# Altium PCB PCB1.PcbDoc
Units mil, origin at the board's own origin, x right, y up, seen from the top; angles counter-clockwise.
Board outline 1560 x 1425 mil, 2 copper layers (Top Layer, Bottom Layer); 33 components, 22 nets, 91 pads, 10 vias.
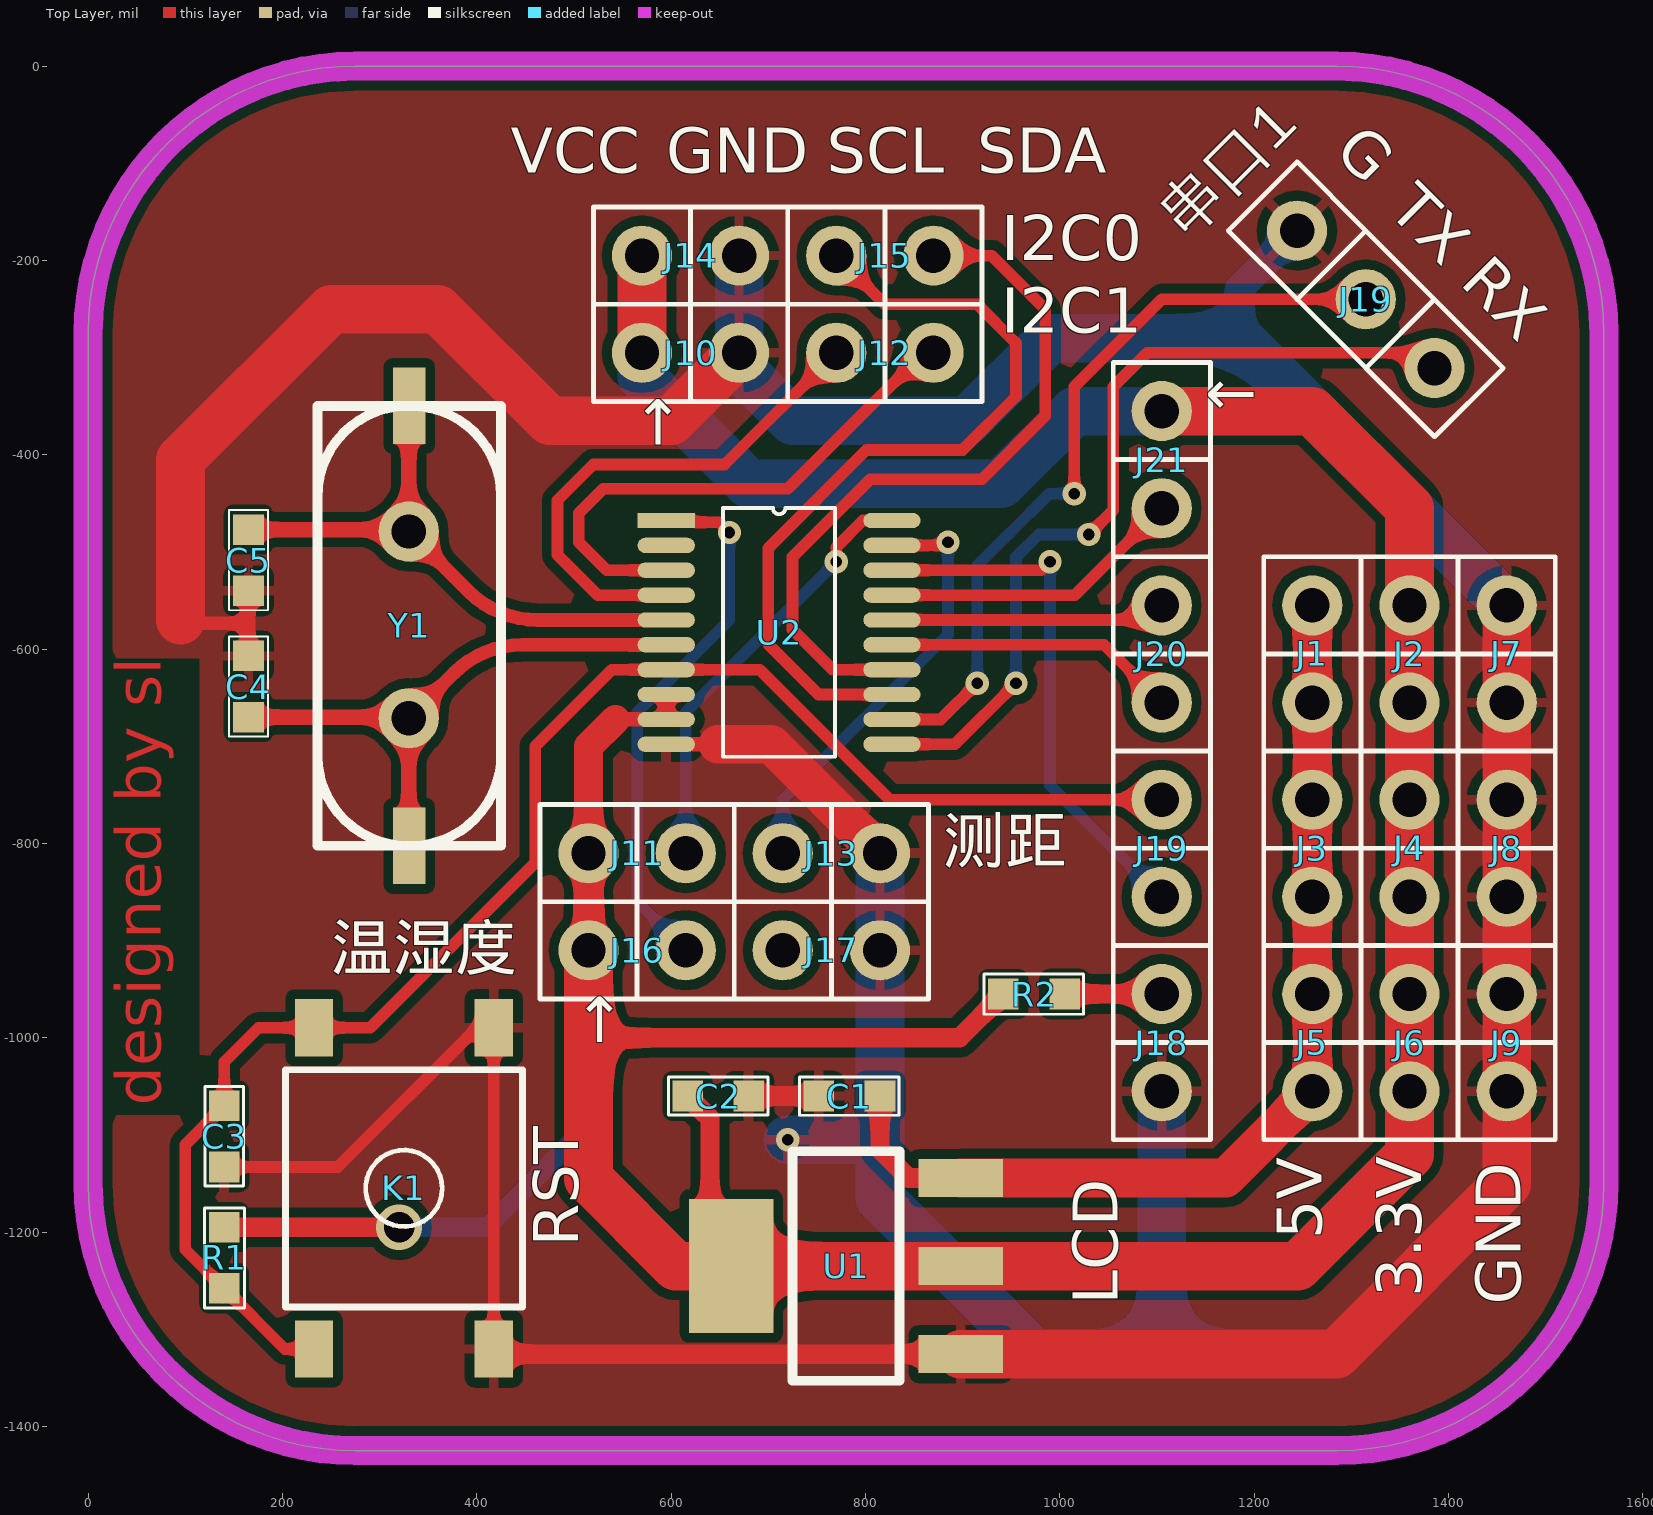
[diagram p0: Top Layer view]
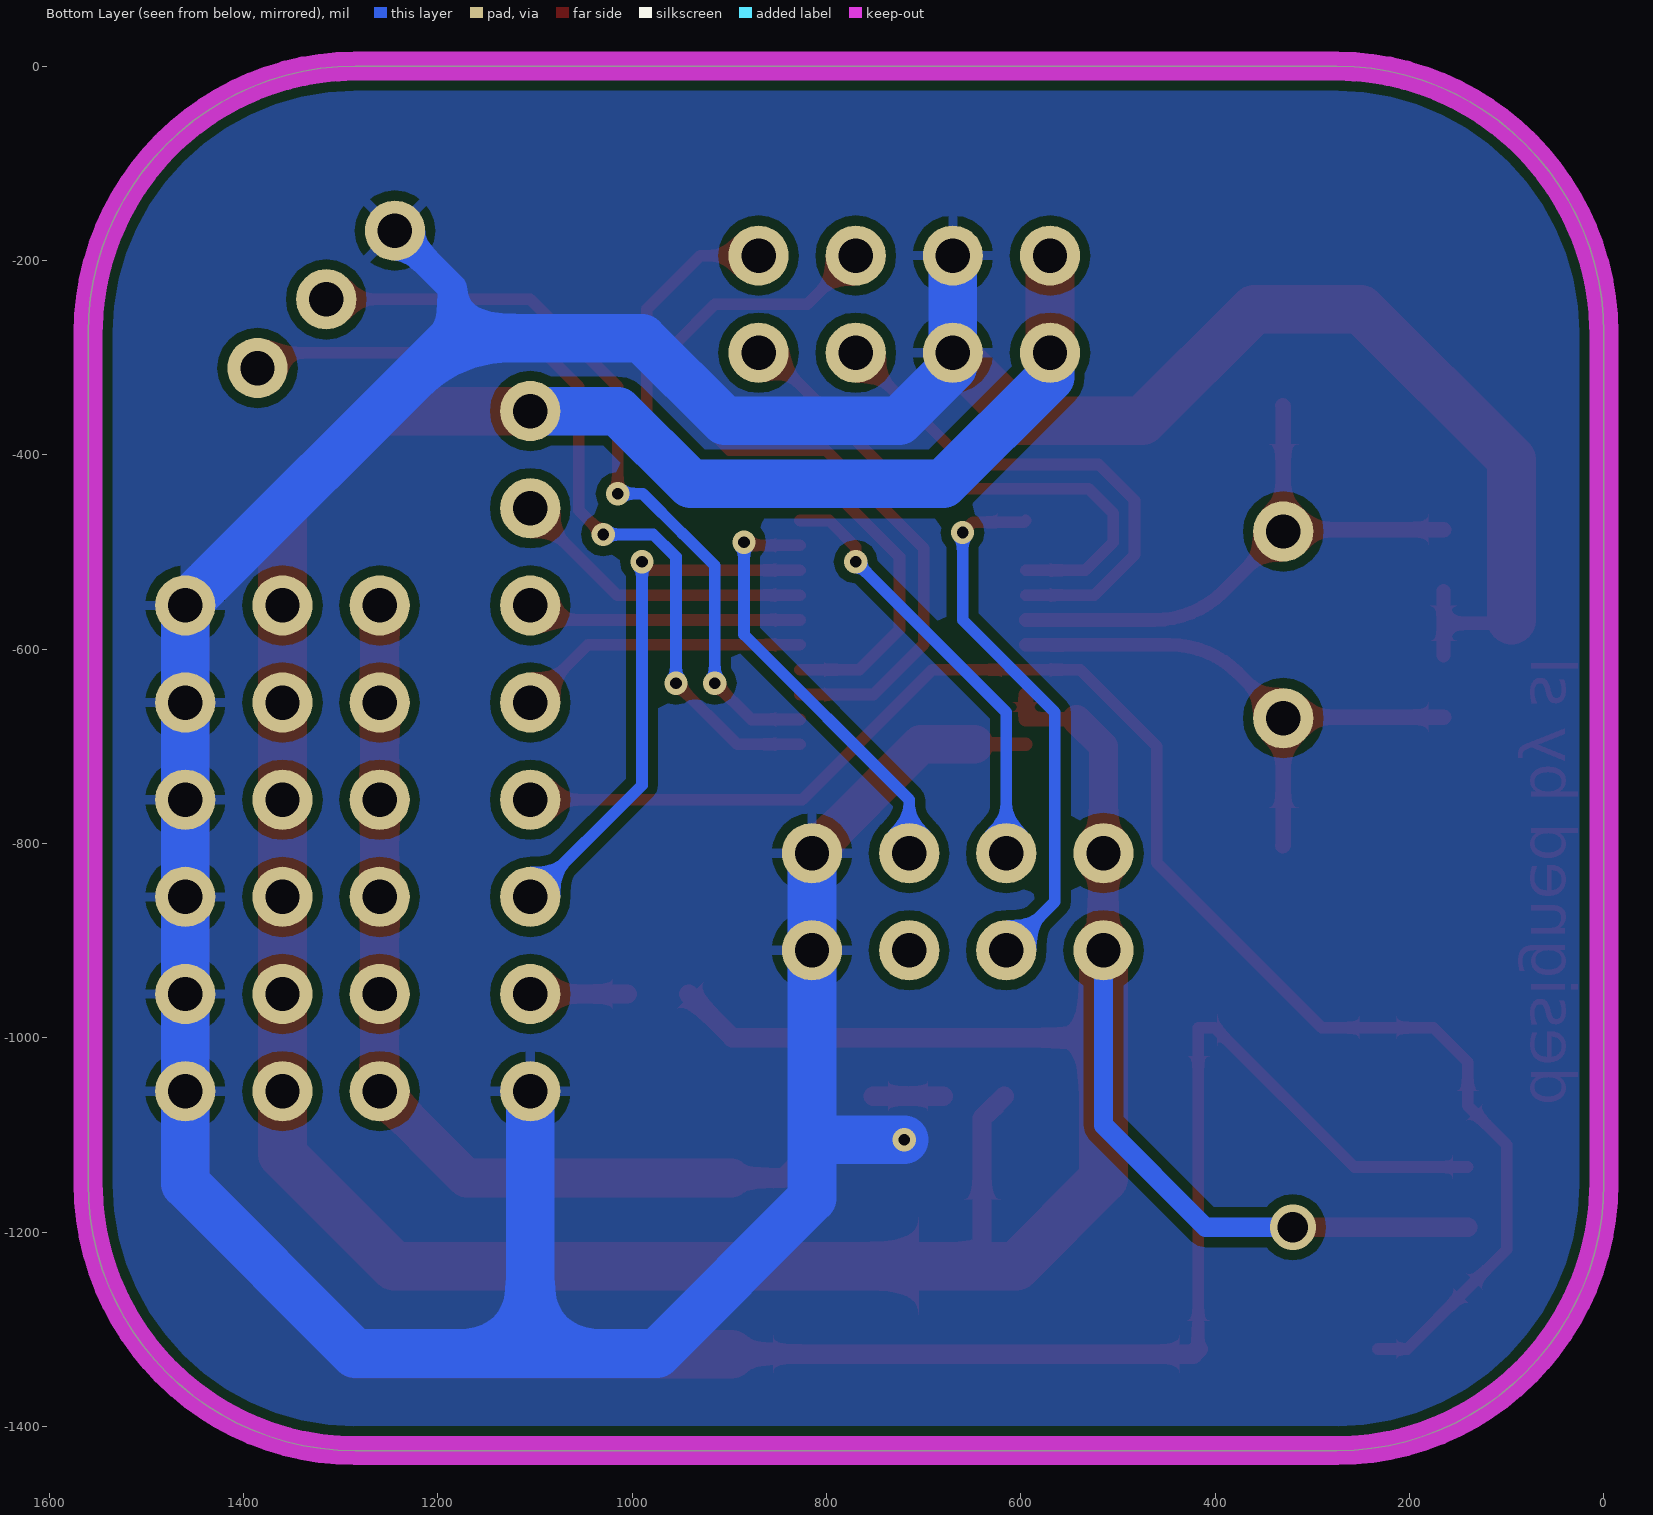
[diagram p1: Bottom Layer view, seen from below]

## Layer stack, top to bottom
Top Solder: solder mask 0.4, Solder Resist, Dk 3.5
Top Layer: signal copper 1.4
Dielectric 1: dielectric 12.6, FR-4, Dk 4.8
Bottom Layer: signal copper 1.4
Bottom Solder: solder mask 0.4, Solder Resist, Dk 3.5

## Board outline
0,-1150 0,-275 cw(c275,-275) 275,0 1285,0 cw(c1285,-275) 1560,-275 1560,-1150 cw(c1285,-1150) 1285,-1425 275,-1425 cw(c275,-1150)

## Design rules (kind name [scope] priority, off if disabled: settings)
Clearance [All] p1: gap=10 ignorepadtopadclearanceinfootprint=FALSE except(0: Arc-Hole Track-Hole SMDPad-Hole THPad-Hole Via-Hole Fill-Hole Poly-Hole Region-Hole Text-Hole; 5: SMDPad-SMDPad)
ComponentClearance [All] p1 off: gap=10 collisioncheckmode=3 verticalgap=10 showdistances=FALSE
Height [All] p1 off: minheight=0 maxheight=1000 prefheight=500
PolygonConnect [All] p1: connectstyle=Relief reliefconductorwidth=10 reliefentries=4 polygonreliefangle="90 Angle" airgapwidth=10
RoutingVias [All] p1: holewidth=28 width=50 viastyle="Through Hole" minholewidth=28 minwidth=50 maxholewidth=28 maxwidth=50
SolderMaskExpansion [All] p1: expansion=4
Width [All] p1: maxlimit=50 minlimit=10 preferedwidth=10 minimp=50.000000 maximp=50.000000 favimp=50.000000
28 further rules are at their usual default settings.

## Components (designator, comment, footprint, x,y, rotation, side; value= is the part's Value field where it differs from the comment)
C1 "C_10UF_0603" CAP_0603_FIRE 752.01,-1060 r0 top value=10U
C2 "C_10UF_0603" CAP_0603_FIRE 680,-1060 r180 top value=10U
C3 "C_10UF_0603" CAP_0603_FIRE 140,-1132.99 r90 top value=10U
C4 "C_20P_0603" C_0603 165,-670 r90 top value=20P
C5 "C_20P_0603" C_0603 165,-540 r90 top value=20P
J1 "1X2PIN" 1X2PIN 1260,-605 r270 top
J2 "1X2PIN" 1X2PIN 1360,-605 r270 top
J3 "1X2PIN" 1X2PIN 1260,-805 r270 top
J4 "1X2PIN" 1X2PIN 1360,-805 r270 top
J5 "1X2PIN" 1X2PIN 1260,-1005 r270 top
J6 "1X2PIN" 1X2PIN 1360,-1005 r270 top
J7 "1X2PIN" 1X2PIN 1460,-605 r270 top
J8 "1X2PIN" 1X2PIN 1460,-805 r270 top
J9 "1X2PIN" 1X2PIN 1460,-1005 r270 top
J10 "1X2PIN" 1X2PIN 620,-295 r0 top
J11 "1X2PIN" 1X2PIN 565,-810 r0 top
J12 "1X2PIN" 1X2PIN 820,-295 r0 top
J13 "1X2PIN" 1X2PIN 765,-810 r0 top
J14 "1X2PIN" 1X2PIN 620,-195 r0 top
J15 "1X2PIN" 1X2PIN 820,-195 r0 top
J16 "1X2PIN" 1X2PIN 565,-910 r0 top
J17 "1X2PIN" 1X2PIN 765,-910 r0 top
J18 "1X2PIN" 1X2PIN 1105,-1005 r90 top
J19 "1X2PIN" 1X3PIN 1315,-240 r135 top
J19 "1X2PIN" 1X2PIN 1105,-805 r90 top
J20 "1X2PIN" 1X2PIN 1105,-605 r90 top
J21 "1X2PIN" 1X2PIN 1105,-405 r90 top
K1 "KEY" SW6.2/6.2-SMD 325,-1155 r270 top
R1 "RES_10K_0603_FIRE" RES_0603_FIRE 140,-1257.99 r90 top value=10K
R2 "RES_10K_0603_FIRE" RES_0603_FIRE 942.01,-955 r0 top value=10K
U1 "LDO" SOT-223 780,-1235 r0 top
U2 "STC8H1K08" TSSOP20 595,-467.64 r0 top
Y1 "XTAL" XTAL 330,-575 r270 top value=32MHz

## Footprints (in the part's own frame and the unit in brackets; to place one, negate y for a bottom-side part, rotate by r counter-clockwise, add the part's x,y. Pads: shape width x height; smd on the part's side, far side on the other; paste and mask are expansions set on the pad)
1X2PIN [mm]
  round 1.575 hole 0.9: 1(-1.27,0) 2(1.27,0)
  silkscreen extent -2.54,-1.27 2.54,1.27
1X3PIN [mm]
  round 1.575 hole 0.9: 1(-2.54,0) 2(0,0) 3(2.54,0)
  silkscreen extent -3.81,-1.27 3.81,1.27
C_0603 [mm]
  rect 0.8x0.8 smd: 1(0,0) 2(1.6,0)
  silkscreen extent -0.51,-0.51 2.11,0.51
CAP_0603_FIRE [mm]
  rect 0.8x0.8 smd: 1(0,0) 2(1.6,0)
  silkscreen extent -0.5,-0.5 2.1,0.5
RES_0603_FIRE [mm]
  rect 0.8x0.8 smd: 1(0,0) 2(1.6,0)
  silkscreen extent -0.51,-0.53 2.1,0.52
SOT-223 [mm]
  rect 2.2x1 smd: 1(3,-2.3) 2(3,0) 3(3,2.3)
  rect 2.2x3.5 smd: 2(-3,0)
  silkscreen extent -1.4,-3 1.4,3, body extent -3.49,-3.24 3.49,3.24, height 1.64
SW6.2/6.2-SMD [mm]
  rect 1.5x1 smd: 1(-4.2,2.35) 2(4.2,2.35) 3(-4.2,-2.35) 4(4.2,-2.35)
  silkscreen extent -3.1,-3.1 3.1,3.1
TSSOP20 [mm]
  rect 1.5x0.4 smd: 1(0,0)
  oval 1.5x0.4 smd: 2(0,-0.65) 3(0,-1.3) 4(0,-1.95) 5(0,-2.6) 6(0,-3.25) 7(0,-3.9) 8(0,-4.55) 9(0,-5.2) 10(0,-5.85) 11(5.9,-5.85) 12(5.9,-5.2) 13(5.9,-4.55) 14(5.9,-3.9) 15(5.9,-3.25) 16(5.9,-2.6) 17(5.9,-1.95) 18(5.9,-1.3) 19(5.9,-0.65) 20(5.9,0)
  silkscreen extent 1.48,-6.18 4.42,0.33, body extent -0.28,-6.17 6.12,0.33, height 1.2
XTAL [mm]
  rect 2x0.85 smd: 1(-5.721,0.013) 2(5.779,0.013)
  round 1.575 hole 0.9: 1(-2.44,0) 2(2.44,0)
  silkscreen extent -5.72,-2.39 5.78,2.41

## Part data
C4 C5: library part C_22P_0603, PCB DECAL=C_0603
J19: library part 1X3PIN
R1 R2: "SURFACE MOUNT RESISTOR 0.031 X 0.061 INCHES, 1/10W", Assembly=SMD, PCB DECAL=RES_0603_FIRE
U2: library part STC8H1K08-36I-TSSOP20
Y1: "CRYSTAL", PCB DECAL=CRYSTAL_SMD_FIRE
C1 C2 C3: PCB DECAL=CAP_0603_FIRE
J1 J2 J3 J4 J5 J6 J7 J8 J9 J10 J11 J12 J13 J14 J15 J16 J17 J18 J19 J20 J21: PCB DECAL=1X2PIN
K1: Manufacturer #1 PN=KEY, PCB DECAL=SW6.2/6.2-SMD

## Via types
v1: diameter 24, hole 12, Top Layer to Bottom Layer, 9 vias
v2: diameter 47.24, hole 31.5, Top Layer to Bottom Layer, 1 vias

## Nets (pads, with @x,y where several pads share a name; then routed paths per layer and width w, separated by ;. In a path a pad name is that pad's centre, name@x,y a point inside that pad or via, vN(x,y) a via of type N, cw(c..) or ccw(c..) an arc to the next point about the centre after c; other vN are vias at no path point)
DHT22: J16.2 U2.1 | length 560.2
  Top Layer w12: U2.1 596.72,-469.35 649.35,-469.35 v1(660,-480)
  Bottom Layer w12: J16.2 565,-860 565,-665 660,-570 v1(660,-480)
GND: C1.1 C2.1 C3.1 C4.2 C5.1 J7.1 J7.2 J8.1 J8.2 J9.1 J9.2 J10.2 J13.2 J14.2 J17.2 J18.1 J19.3 K1.1 K1.2 U1.1 U2.10 | length 7050.7
  Top Layer w12: C3.1 257.01,-1132.99 400.35,-989.65 K1.1 K1.2
  Top Layer w14: 95,-570 98.5,-573.5 165,-573.5 ; C4.2 165,-573.5 ; C5.1 165,-573.5 ; U2.10 647.95,-697.95
  Top Layer w20: K1.2 422.72,-1325.55 U1.1 ; C2.1 C1.1
  Top Layer w40: 647.95,-697.95 702.95,-697.95 J13.2
  Top Layer w50: 95,-570 95,-405 250,-250 360,-250 475,-365 600,-365 J10.2 ; U1.1 1284.45,-1325.55 1460,-1150 J9.2 J9.1 J8.2 J8.1 J7.2 J7.1
  Bottom Layer w30: 1185,-280 1185,-228.58 J19.3
  Bottom Layer w50: J14.2 J10.2 670,-310 725,-365 905,-365 990,-280 1185,-280 J7.1 J7.2 J8.1 J8.2 J9.1 J9.2 1460,-1150 1285,-1325 1105,-1325 ; v1(720,-1105) 810,-1105 815,-1110 ; J13.2 J17.2 815,-1110 ; J18.1 1105,-1325 ; 815,-1110 815,-1165 975,-1325 1105,-1325
HCSR04_R: J13.1 U2.19 | length 449.5
  Top Layer w12: U2.19 881.77,-493.23 v1(885,-490)
  Bottom Layer w12: J13.1 715,-755 885,-585 v1(885,-490)
HCSR04_T: J11.2 U2.20 | length 447.8
  Top Layer w12: v1(770,-510) 770,-495 797.36,-467.64 U2.20
  Bottom Layer w12: J11.2 615,-665 v1(770,-510)
I2C0SCL: J12.1 U2.4 | length 535.1
  Top Layer w12: U2.4 524.41,-544.41 483,-503 483,-447 520,-410 655,-410 J12.1
I2C0SDA: J12.2 U2.3 | length 565.3
  Top Layer w12: U2.3 533.82,-518.82 505,-490 505,-460 530,-435 720,-435 860,-295 J12.2
I2C1SCL: J15.1 U2.13 | length 844.6
  Top Layer w12: J15.1 820,-245 915,-245 955,-285 955,-340 900,-395 801.11,-395 700,-496.11 700,-595 751.77,-646.77 U2.13
I2C1SDA: J15.2 U2.14 | length 762.2
  Top Layer w12: U2.14 766.18,-621.18 725,-580 725,-505 805,-425 920,-425 985,-360 985,-250 930,-195 J15.2
LCD_CS: J19.1@1105,-855 U2.18 | length 559
  Top Layer w12: U2.18 981.18,-518.82 v1(990,-510)
  Bottom Layer w12: v1(990,-510) 990,-740 J19.1@1105,-855
LCD_D/C: J20.1 U2.15 | length 302.3
  Top Layer w12: U2.15 1045.59,-595.59 J20.1
LCD_SCL: J20.2 U2.16 | length 283.9
  Top Layer w12: U2.16 1090,-570 J20.2
LCD_SDA: J21.1 U2.17 | length 314.8
  Top Layer w12: U2.17 1015.59,-544.41 J21.1
MOSI: U2.2
NetC4_1: C4.1 U2.6 Y1.2 | length 589
  Top Layer w14: Y1.2@330,-671.06 376.18,-624.88 cw(c446.89,-695.59) 446.89,-595.59 U2.6
  Top Layer w16: C4.1 328.94,-670 330,-671.06 330,-801.99 Y1.2@330.51,-802.5
NetC5_2: C5.2 U2.5 Y1.1 | length 593.6
  Top Layer w14: Y1.1@330,-478.94 391.77,-540.71 ccw(c462.48,-470) 462.48,-570 U2.5
  Top Layer w16: C5.2 328.07,-477.01 330,-478.94 330,-350.26 Y1.1@330.51,-349.74
NetJ18_2: J18.2 R2.2 | length 100
  Top Layer w20: R2.2 J18.2
RST: C3.2 J19.2@1105,-755 K1.3 K1.4 R1.1 U2.7 | length 1642.4
  Top Layer w12: K1.4 202.36,-1320.35 R1.1 100,-1217.99 100,-1110 C3.2 140,-1025 175.35,-989.65 K1.3 290.35,-989.65 460,-820 460,-700 538.82,-621.18 U2.7 691.18,-621.18 825,-755 J19.2@1105,-755
USART_RX: J19.1@1385.71,-310.71 U2.11 | length 882.4
  Top Layer w12: U2.11 892.05,-697.95 v1(955,-635) ; v1(1030,-482) 1055,-457 1055,-330 1090,-295 1370,-295 J19.1@1385.71,-310.71
  Bottom Layer w12: v1(955,-635) 955,-505 957,-503 957.4,-503 978.4,-482 v1(1030,-482)
USART_TX: J19.2@1315,-240 U2.12 | length 802.2
  Top Layer w12: U2.12 877.64,-672.36 v1(915,-635) ; v1(1015,-440) 1015,-330 1105,-240 J19.2@1315,-240
  Bottom Layer w12: v1(915,-635) 915,-513.89 947.89,-481 948.29,-481 989.29,-440 v1(1015,-440)
VCC: 
VCC3.3: C2.2 J2.1 J2.2 J4.1 J4.2 J6.1 J6.2 J10.1 J11.1 J14.1 J16.1 J21.2 R1.2 R2.1 U1.2 U2.8 U2.9 | length 4427.7
  Top Layer w15: 542.64,-672.36 U2.9 U2.8
  Top Layer w20: R1.2 v2(320,-1195) ; 515,-1000 897.01,-1000 R2.1 ; C2.2 640,-1082.99 640,-1213.11 U1.2@661.89,-1235
  Top Layer w30: J16.1 J11.1 515,-700 542.64,-672.36
  Top Layer w50: J16.1 515,-1000 515,-1145 605,-1235 661.89,-1235 898.11,-1235 1245,-1235 1360,-1120 J6.2 J6.1 J4.2 J4.1 J2.2 J2.1 1360,-455 1260,-355 J21.2 ; J10.1 J14.1
  Bottom Layer w20: v2(320,-1195) 410,-1195 515,-1090 J16.1
  Bottom Layer w50: J10.1 570,-320 680,-430 940,-430 1015,-355 J21.2
VCC5V: C1.2 J1.1 J1.2 J3.1 J3.2 J5.1 J5.2 U1.3 | length 1049.2
  Top Layer w20: C1.2 815,-1115 844.45,-1144.45 U1.3
  Top Layer w40: U1.3 1170.55,-1144.45 J5.2 J5.1 J3.2 J3.1 J1.2 J1.1
pads on no net: J17.1

## Polygon pours and split planes (outlines as drawn)
GND on Bottom Layer "Top Layer-No Net" (solid, remove dead copper, pour order 12): 1710,-1555 1710,155 -125,155 -125,-1555
GND on Top Layer "Top Layer-No Net" (solid, remove dead copper, pour order 14): -70,80 1645,80 1645,-1530 -70,-1530

## Keep-outs
Keep-Out Layer:
  the board outline again, w30

## Other copper
Top Layer:
  text "designed by sl" at 90,-1070 h80 r90

## Silkscreen, mask and mechanical layers (free items; w line width, h text height)
Top Overlay:
  text "G" at 1270,-100 h80 r315
  text "VCC" at 435,-125 h80
  text "GND" at 595,-125 h80
  text "SCL" at 760,-125 h80
  text "SDA" at 915,-125 h80
  text "TX" at 1325,-160 h80 r315
  text "串口1" at 1140,-190 h80 r45
  text "I2C0" at 940,-215 h80
  text "RX" at 1400,-235 h80 r315
  text "I2C1" at 940,-290 h80
  text "↑" at 1215,-365 h80 r90
  text "↑" at 560,-405 h80
  text "测距" at 880,-835 h80
  text "温湿度" at 250,-945 h80
  text "↑" at 500,-1020 h80
  text "5V" at 1285,-1207.59 h80 r90
  text "RST" at 520,-1215 h80 r90
  text "3.3V" at 1387.28,-1267.23 h80 r90
  text "LCD" at 1075,-1275 h80 r90
  text "GND" at 1490,-1275 h80 r90
Top Solder:
  text "designed by sl" at 90,-1070 h80 r90